# Altium PCB ALTAIR_PD_Squad_V26.5a.PcbDoc (part 3 of 3)
Units mm, origin at the board's own origin, x right, y up, seen from the top; angles counter-clockwise.
Board outline 65 x 52 mm, 4 copper layers (Top Layer, Layer 2, Layer 3, Bottom Layer), stack 1.818 mm thick; 171 components, 122 nets, 540 pads, 371 vias.
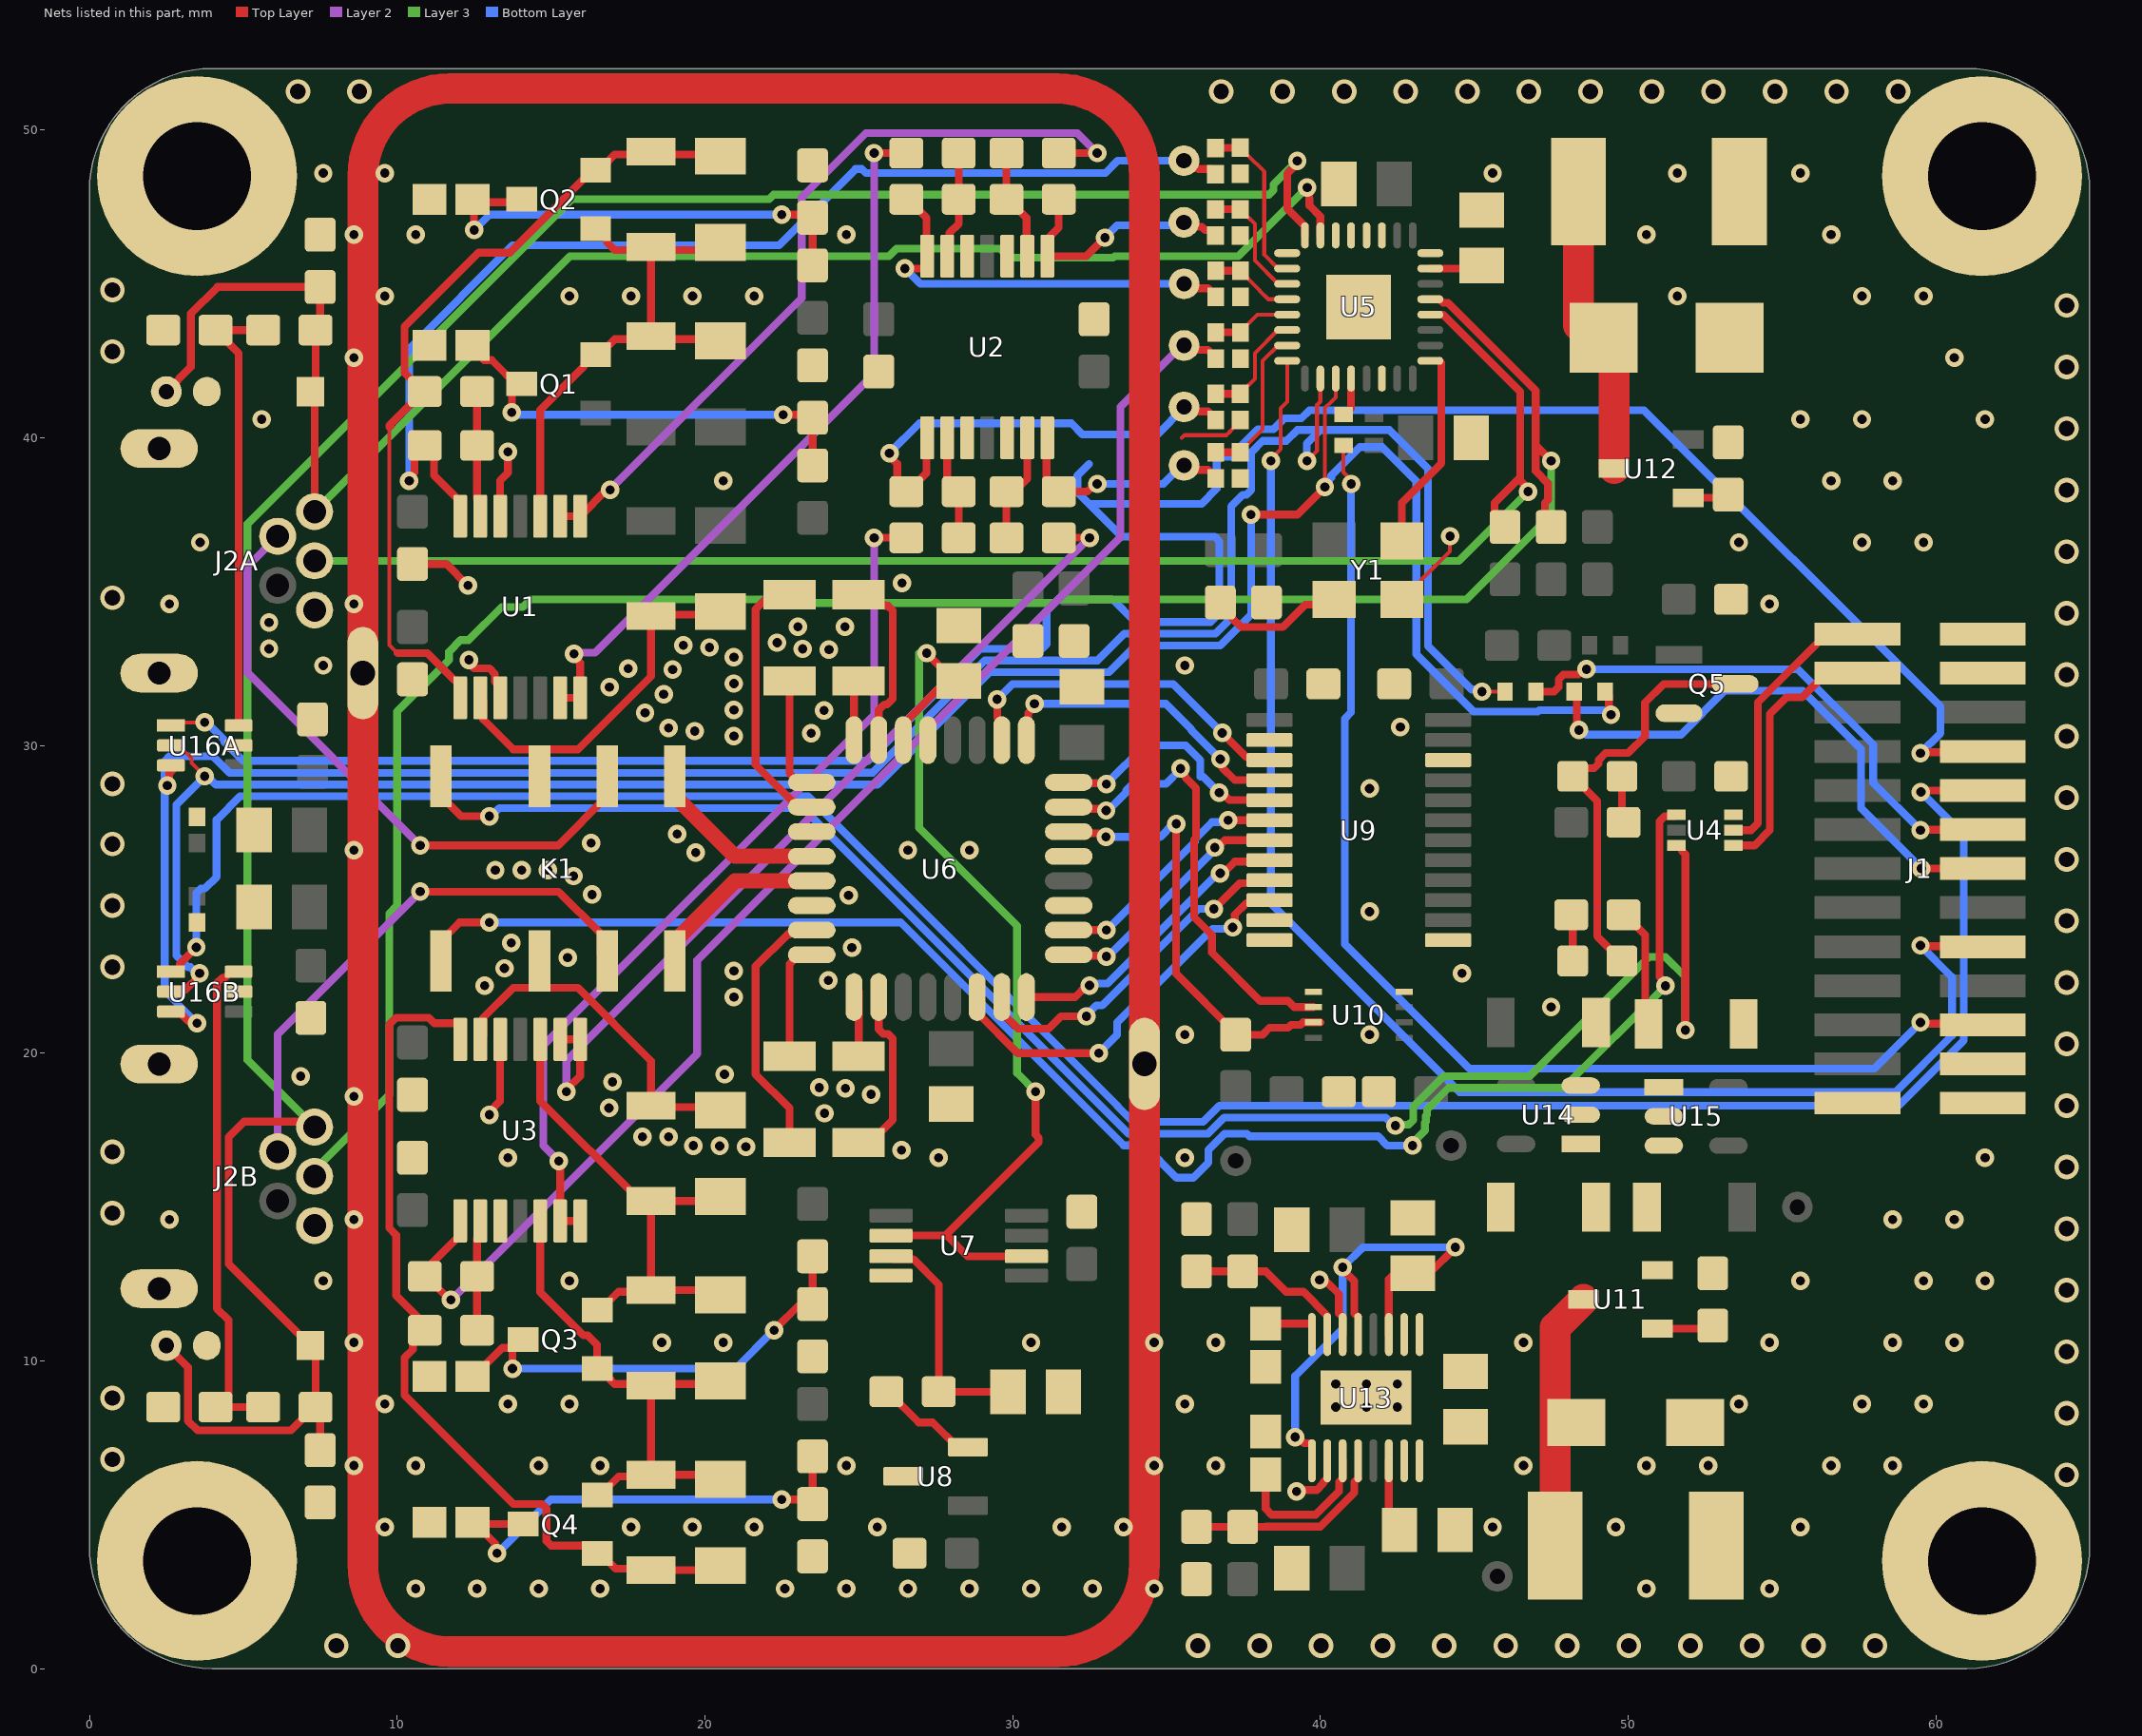
[diagram p4: the nets of this part, all layers, seen from the top]

## Via types
v1: diameter 0.6, hole 0.3, Top Layer to Bottom Layer, tented both sides, 305 vias
v2: diameter 0.8, hole 0.5, Top Layer to Bottom Layer, 59 vias
v3: diameter 0.6, hole 0.3, Top Layer to Bottom Layer, 7 vias

## Nets (pads, with @x,y where several pads share a name; then routed paths per layer and width w, separated by ;. In a path a pad name is that pad's centre, name@x,y a point inside that pad or via, vN(x,y) a via of type N, cw(c..) or ccw(c..) an arc to the next point about the centre after c; other vN are vias at no path point) (continued)
NetC1_2: C1.2 K1.7 R5.1 U1.2 | length 12.5
  Top Layer w0.254: U1.2@12.7,31.55 12.798,31.452 12.798,30.847 13.772,29.873 14.404,29.873 K1.7@14.627,29.65 ; K1.7@14.627,29 K1.7@14.627,29.65 ; C1.2@18.25,34.2 18.25,32.25 15.873,29.873 14.85,29.873 K1.7@14.627,29.65 ; C1.2@18.4,34.25 R5.1@20.5,34.25
NetC2_1: C2.1 C3.2 Q1.2 Q2.1 R6.2 R7.1 U1.10 | length 17.8
  Top Layer w0.254: U1.10@14.65,37.45 14.65,40.9 16.077,42.327 16.077,42.427 16.35,42.7 Q1.2@16.45,42.7 ; Q1.2@16.45,42.6 16.55,42.6 16.823,42.873 16.823,42.954 17.069,43.2 C2.1@18.25,43.2 ; Q2.1@16.45,46.7 16.55,46.7 16.823,46.427 16.823,46.346 17.069,46.1 C3.2@18.25,46.1 ; R6.2@20.5,43.05 20.35,43.2 C2.1@18.25,43.2 ; R7.1@20.5,46.25 20.35,46.1 C3.2@18.25,46.1 ; C2.1@18.25,43.2 C3.2@18.25,46.1
NetC3_1: C3.1 Q2.2 R7.2 R9.1 U1.1 | length 27
  Top Layer w0.127: 9.746,40.346 9.746,33.268 10.014,33
  Top Layer w0.254: 9.746,40.346 9.8,40.4 ; 9.746,40.396 R9.1@10.85,41.5 ; 10.014,33 10.986,33 11.863,32.123 11.952,32.123 12.05,32.025 U1.1@12.05,31.55 ; R9.1@10.9,41.5 R9.1@10.85,41.5 ; Q2.2@16.45,48.6 16.25,48.6 13.668,46.018 12.652,46.018 10.243,43.608 10.243,42.107 R9.1@10.85,41.5 ; Q2.2@16.55,48.6 16.823,48.873 16.823,48.954 17.069,49.2 20.35,49.2 R7.2@20.5,49.05
NetC6_2: C6.2 Q1.3 R10.1 R12.2 | length 14.6
  Top Layer w0.254: C6.2@12.451,42.9 12.827,42.524 13.076,42.524 13.95,41.65 Q1.3@14.05,41.65 ; v1(13.729,40.827) 13.729,41.477 14.002,41.75 Q1.3@14.05,41.75 ; v1(22.548,40.75) 23.4,40.75 R12.2@23.5,40.65 R10.1@23.5,39.1
  Bottom Layer w0.254: v1(13.729,40.827) 13.806,40.75 v1(22.548,40.75)
NetC7_2: C7.2 Q2.3 R11.1 R13.2 | length 15.4
  Top Layer w0.254: C7.2@12.451,47.65 Q2.3@14.05,47.65 ; C7.2@12.451,47.75 12.5,47.701 v1(12.5,46.75) ; v1(22.5,47.25) 23.4,47.25 R13.2@23.5,47.15 R11.1@23.5,45.6
  Bottom Layer w0.254: v1(12.5,46.75) 13,47.25 v1(22.5,47.25)
NetC11_1: C11.1 C12.2 Q3.1 Q4.2 R19.2 R20.1 U3.12 | length 16
  Top Layer w0.254: U3.12@14.65,14.55 14.65,12.241 16.053,10.838 16.193,10.838 16.5,10.531 Q3.1@16.5,9.75 ; Q4.2@16.5,5.65 16.6,5.65 17.2,6.25 C12.2@17.5,6.25 ; Q3.1@16.6,9.75 16.92,9.43 16.92,9.399 17.069,9.25 C11.1@18.25,9.25 ; R20.1@20.25,6.25 20.2,6.3 C12.2@18.25,6.3 C11.1@18.25,9.25 ; R19.2@20.5,9.35 20.4,9.25 C11.1@18.25,9.25
NetC11_2: C11.2 C13.1 Q3.2 R18.2 R19.1 U3.3 | length 15.8
  Top Layer w0.254: U3.3@14.65,20.45 14.65,18.45 17.85,15.25 18.25,15.25 C11.2@18.25,12.3 ; Q3.2@16.5,11.65 16.6,11.65 17.2,12.25 C11.2@17.5,12.25 ; C11.2@17.9,12.3 C11.2@18.25,12.3 ; C13.1@18.25,15.2 20.2,15.2 R18.2@20.25,15.25 ; R19.1@20.5,12.15 20.35,12.3 C11.2@18.25,12.3
NetC12_1: C12.1 Q4.1 R20.2 R22.1 U3.7 | length 27.6
  Top Layer w0.254: R22.1@10.75,11.25 10.75,11.35 9.968,12.132 9.968,14.096 9.746,14.318 9.746,20.932 9.968,21.154 11.032,21.154 11.212,20.974 11.952,20.974 12.05,20.876 U3.7@12.05,20.45 ; R22.1@10.9,11 10.887,11 10.514,10.627 10.514,10.379 10.243,10.108 10.243,8.892 13.781,5.354 14.705,5.354 14.854,5.205 14.854,4.149 15.003,4 16.25,4 Q4.1@16.5,3.75 ; Q4.1@16.6,3.75 17.1,3.25 C12.1@17.578,3.25 ; C12.1@18.25,3.2 20.2,3.2 R20.2@20.25,3.25
NetC13_2: C13.2 K1.2 R18.1 U3.6 | length 12.2
  Top Layer w0.254: U3.6@12.7,20.45 12.798,20.548 12.798,21.153 13.772,22.127 14.404,22.127 K1.2@14.627,22.35 ; K1.2@14.627,23 K1.2@14.627,22.35 ; C13.2@18.25,18.25 18.25,19.75 15.873,22.127 14.85,22.127 K1.2@14.627,22.35 ; C13.2@18.25,18.3 18.3,18.25 R18.1@20.5,18.25
NetC17_2: C17.2 Q3.3 R23.1 R25.2 | length 15.6
  Top Layer w0.254: C17.2@12.451,9.5 12.5,9.5 13.427,10.427 13.827,10.427 Q3.3@14.1,10.7 14.023,10.7 13.75,10.427 v1(13.75,9.75) ; v1(22.25,11) 23.1,11.85 R25.2@23.5,11.85 R23.1@23.5,13.5
  Bottom Layer w0.254: v1(13.75,9.75) 21,9.75 v1(22.25,11)
NetC18_2: C18.2 Q4.3 R24.1 R26.2 | length 15.4
  Top Layer w0.254: C18.2@12.451,4.75 12.5,4.75 13.184,4.066 13.184,3.816 v1(13.25,3.75) ; C18.2@12.75,4.75 12.8,4.7 Q4.3@14.1,4.7 ; v1(22.5,5.5) 23.35,5.5 R26.2@23.5,5.35 ; R26.2@23.5,5.3 R24.1@23.5,6.9
  Bottom Layer w0.254: v1(13.25,3.75) 15,5.5 v1(22.5,5.5)
NetC24_2: C24.2 U5.23 | length 2
  Top Layer w0.254: U5.23@43.575,45.5 45.25,45.5 C24.2@45.5,45.25
NetC35_1: C35.1 U6.22 U7.2 U7.6 | length 30.3
  Top Layer w0.254: U7.2@26.05,14.075 27.825,14.075 30.85,17.1 30.85,17.25 30.75,17.35 v1(30.75,18.75) ; U6.22@26.5,30.25 26.5,30.75 C35.1@27.85,32.1 ; v1(27.21,33) 27.21,32.99 28.1,32.1 C35.1@28.25,32.1 ; 27.864,14.075 28.539,13.4 U7.6@30.45,13.4
  Layer 3 w0.254: v1@26.96,33 26.96,27.325 30.147,24.138 30.147,19.353 v1(30.75,18.75)
NetC36_1: C36.1 R36.1 U7.3 | length 7.7
  Top Layer w0.254: U7.3@26.05,13.4 26.148,13.302 26.778,13.302 27.6,12.48 R36.1@27.6,9 C36.1@29.85,9
NetC39_2: C39.2 U13.6 | length 2.4
  Top Layer w0.254: U13.6@42.225,6.759 42.227,6.757 42.227,4.857 C39.2@42.575,4.509
NetC42_2: C42.2 U13.16 | length 1.8
  Top Layer w0.254: C42.2@38.225,11.21 39.723,11.21 39.725,11.208 U13.16@39.725,10.859
NetC43_1: C43.1 U13.7 U13.8
NetC43_2: C43.2 U13.9 U13.10
NetC45_2: C45.2 U13.3 | length 4.9
  Top Layer w0.254: C45.2@38.225,6.308 38.225,5.195 38.42,5 39.844,5 40.606,5.762 40.606,6.069 40.725,6.188 U13.3@40.725,6.759
NetCX1A_1: CX1A.1 U6.2 | length 5.7
  Top Layer w0.254: CX1A.1@25,17 25.275,17 26.104,17.829 26.104,20.48 25.955,20.629 25.796,20.629 25.647,20.778 U6.2@25.647,21.825
NetCX1A_2: CX1A.2 U6.1 | length 2.1
  Top Layer w0.254: CX1A.2@25,19.9 U6.1@25,22
NetCX1B_1: CX1B.1 U6.31 | length 8.5
  Top Layer w0.254: CX1B.1@22.75,17.1 22.75,18.216 21.646,19.32 21.646,22.817 22.691,23.862 22.754,23.862 22.892,24 U6.31@23.5,24
NetCX1B_2: CX1B.2 U6.32 | length 3.6
  Top Layer w0.254: CX1B.2@22.75,19.9 22.75,22.898 23.102,23.25 U6.32@23.25,23.25
NetCX2A_1: CX2A.1 U6.23 | length 5.5
  Top Layer w0.254: CX2A.1@25.348,34.952 25.348,34.927 25.723,34.552 25.854,34.552 25.872,34.534 25.955,34.534 26.104,34.386 26.104,31.52 25.918,31.334 25.834,31.334 25.647,31.147 U6.23@25.647,30.175
NetCX2A_2: CX2A.2 U6.24 | length 2.4
  Top Layer w0.254: U6.24@24.847,30.175 CX2A.2@24.847,32.347 ; CX2A.2@24.847,32.097 CX2A.2@25,32.25
NetCX2B_1: CX2B.1 U6.25 | length 4.1
  Top Layer w0.254: CX2B.1@22.75,32.35 22.75,29.097 23.047,28.8 U6.25@23.472,28.8
NetCX2B_2: CX2B.2 U6.26 | length 8.8
  Top Layer w0.254: CX2B.2@22.75,35.15 22.375,35.15 21.646,34.421 21.646,32.354 21.646,29.378 23.024,28 U6.26@23.472,28
NetD2_1: D2.1 D4.1 Q5.3 | length 13.9
  Top Layer w0.254: D2.1@49.8,23 49,23.8 49,28.2 D4.1@48.2,29 48.46,29.26 48.897,29.26 49.046,29.409 49.046,29.532 49.268,29.754 50.004,29.754 50.55,30.3 50.55,31.39 51.16,32 Q5.3@53.5,32
NetD2_2: D2.2 R38.1 | length 1.5
  Top Layer w0.254: R38.1@48.15,24.5 48.2,24.45 D2.2@48.2,23
NetD3_1: D3.1 F2.2 U12.3 | length 9.5
  Top Layer w1: F2.2@48.385,48 48.385,43.652 49.55,42.487 U12.3@49.55,39
NetD4_2: D4.2 R40.1 | length 1.5
  Top Layer w0.254: D4.2@49.8,29 49.8,27.55 R40.1@49.85,27.5
NetJ1_14: J1.14 R43.1 | length 18.5
  Top Layer w0.254: R43.1@48.3,31.7 48.334,31.666 48.334,30.566 v1(48.4,30.5) ; v1(59.526,26) J1.14@61.523,26
  Bottom Layer w0.254: v1(48.4,30.5) 48.494,30.5 48.643,30.351 51.712,30.351 53.14,31.778 55.676,31.778 57.568,29.886 57.568,27.958 v1(59.526,26)
NetK1_1: K1.1 U4.4 | length 53.7
  Top Layer w0.254: K1.1@11.427,23 11.427,23.65 12.027,24.25 v1(13,24.25) ; v1(51.216,22.19) 51.216,22.283 51.021,22.478 51.021,27.53 51.193,27.702 51.527,27.702 U4.4@51.575,27.75
  Layer 3 w0.254: v1(43,17) 43,17.094 43.4,17.493 43.4,17.743 43.432,17.775 43.432,17.961 43.467,17.996 43.467,18.176 44.166,18.875 47.901,18.875 v1(51.216,22.19)
  Bottom Layer w0.254: v1(13,24.25) 26.361,24.25 33.604,17.007 34.278,17.007 35.332,15.953 35.868,15.953 36.362,16.447 36.362,16.858 36.885,17.381 37.615,17.381 37.696,17.3 41.875,17.3 42.175,17 v1(43,17)
NetK1_4: K1.4 U6.29 | length 5.9
  Top Layer w0.5: K1.4@19,23 19,23.623 20.977,25.6 U6.29@23.472,25.6
NetK1_5: K1.5 U6.28 | length 5.9
  Top Layer w0.5: K1.5@19,29 19,28.377 20.977,26.4 U6.28@23.472,26.4
NetK1_8: K1.8 U4.6 | length 56.9
  Top Layer w0.254: K1.8@11.427,29 11.427,28.35 12.078,27.7 v1(13,27.7) ; U4.6@51.575,26.75 51.7,26.75 51.748,26.702 51.748,26.577 51.863,26.462 v1(51.863,20.75)
  Layer 3 w0.254: v1(42.443,17.647) 42.471,17.675 42.87,17.675 43.019,17.824 43.019,18.266 44.008,19.256 46.798,19.256 50.676,23.134 51.212,23.134 51.863,22.484 v1(51.863,20.75)
  Bottom Layer w0.254: v1(13,27.7) 13.056,27.7 13.322,27.966 23.184,27.966 33.762,17.388 36.353,17.388 36.878,17.913 42.121,17.913 42.387,17.647 v1(42.443,17.647)
NetR1_1: R1.1 R2.2 U2.13 | length 3.5
  Top Layer w0.254: U2.13@27.85,45.95 27.948,46.048 27.948,46.653 28.25,46.955 R1.1@28.25,47.75 R2.2@28.25,49.25
NetR1_2: R1.2 R32.1 TP3.1 U2.14 | length 13.6
  Top Layer w0.254: v1(26.5,45.5) 27.129,45.5 27.2,45.571 27.2,47.15 26.6,47.75 R1.2@26.55,47.75 ; TP3.1@35.571,45 35.714,44.857 36.343,44.857 R32.1@36.5,44.7
  Bottom Layer w0.254: v1(26.5,45.5) 27,45 TP3.1@35.68,45
NetR2_1: R2.1 U1.6 U1.7 | length 23.9
  Top Layer w0.254: U1.6@15.3,31.55 U1.7@15.95,31.55 15.95,32.682 15.75,32.882 v1(15.75,32.976) ; v1(25.5,49.25) R2.1@26.55,49.25
  Layer 2 w0.254: v1(15.75,32.976) 15.793,33.019 16.431,33.019 25.5,42.088 v1(25.5,49.25)
NetR3_1: R3.1 R4.2 U2.9 | length 3.6
  Top Layer w0.254: R4.2@29.8,49.25 R3.1@29.8,47.75 29.85,47.75 30.45,47.15 U2.9@30.45,45.95
NetR3_2: R3.2 R30.1 TP2.1 U2.8 | length 8.4
  Top Layer w0.254: U2.8@31.1,45.95 31.1,46.425 31.5,46.825 R3.2@31.5,47.75 ; U2.8@31.127,45.899 32.399,45.899 v1(33,46.5) ; TP2.1@35.567,47 35.709,46.857 36.143,46.857 36.252,46.748 36.448,46.748 36.5,46.696 R30.1@36.5,46.5
  Bottom Layer w0.254: v1(33,46.5) 33.4,46.9 TP2.1@35.853,46.9
NetR4_1: R4.1 U1.8 U1.9 | length 26
  Top Layer w0.254: U1.9@15.3,37.45 U1.8@15.95,37.45 16.809,38.309 v1(16.92,38.309) ; R4.1@31.5,49.25 v1(32.75,49.25)
  Layer 2 w0.254: v1(16.92,38.309) 23.147,44.536 23.147,47.812 25.232,49.897 32.103,49.897 v1(32.75,49.25)
NetR8_1: R8.1 R9.2 U1.13 | length 4
  Top Layer w0.254: R9.2@12.6,41.4 R8.1@12.6,39.75 12.6,38.025 12.7,37.925 U1.13@12.7,37.45
NetR8_2: R8.2 R28.1 TP1.1 U1.14 | length 37.8
  Top Layer w0.254: v1(10.393,38.602) 10.393,38.696 10.566,38.869 10.566,39.416 R8.2@10.9,39.75 11.198,39.452 11.198,38.777 12.05,37.925 U1.14@12.05,37.45 ; TP1.1@35.567,49.003 35.769,49.003 36.041,48.731 36.448,48.731 36.6,48.579 R28.1@36.6,48.5
  Bottom Layer w0.254: v1(10.393,38.602) 10.393,42.893 13.75,46.25 22.415,46.25 24.895,48.73 25.105,48.73 25.232,48.603 33.018,48.603 33.415,49 TP1.1@35.865,49
NetR14_1: R14.1 R15.2 U2.6 | length 3.5
  Top Layer w0.254: R15.2@29.8,36.75 29.8,37.985 30.477,38.662 U2.6@30.477,39.999
NetR14_2: R14.2 R35.1 TP6.1 U2.7 | length 7.7
  Top Layer w0.254: U2.7@31.1,40.05 31.1,38.623 31.473,38.25 R14.2@31.5,38.25 32.431,38.25 32.681,38.5 v1(32.75,38.5) ; TP6.1@35.571,39.1 35.714,38.957 36.343,38.957 R35.1@36.6,38.7
  Bottom Layer w0.254: v1(32.75,38.5) 34.9,38.5 TP6.1@35.6,39.2
NetR15_1: R15.1 U3.1 U3.2 | length 28.6
  Top Layer w0.254: U3.2@15.3,20.45 U3.1@15.95,20.45 15.95,19.263 15.5,18.813 v1(15.5,18.75) ; R15.1@31.5,36.75 v1(32.502,36.75)
  Layer 2 w0.254: v1(15.5,18.75) 15.5,19.748 v1(32.502,36.75)
NetR16_1: R16.1 R17.2 U2.2 | length 3.4
  Top Layer w0.254: U2.2@27.877,39.999 27.877,38.51 28.25,38.137 R17.2@28.25,36.75
NetR16_2: R16.2 R34.1 TP5.1 U2.1 | length 15.3
  Top Layer w0.254: v1(26,39.5) 26,39.406 26.252,39.154 26.252,38.548 R16.2@26.55,38.25 ; R16.2@26.6,38.25 27.2,38.85 U2.1@27.2,40.05 ; TP5.1@35.571,41 35.714,40.857 36.343,40.857 36.5,40.7 R34.1@36.5,40.6
  Bottom Layer w0.254: v1(26,39.5) 26.969,40.469 31.912,40.469 32.273,40.108 34.706,40.108 35.578,40.98 TP5.1@35.68,40.98
NetR17_1: R17.1 U3.13 U3.14 | length 28.7
  Top Layer w0.254: v1(15.25,16.5) 15.3,16.45 U3.13@15.3,14.55 U3.14@15.95,14.55 U3.14@16,14.5 ; v1(25.5,36.75) R17.1@26.55,36.75
  Layer 2 w0.254: v1(15.25,16.5) 14.75,17 14.75,20.25 25.5,31 v1(25.5,36.75)
NetR21_1: R21.1 R22.2 U3.9 | length 3.3
  Top Layer w0.254: R22.2@12.6,11.25 12.6,13 12.6,13.975 12.75,14.125 U3.9@12.75,14.5
NetR21_2: R21.2 R33.1 TP4.1 U3.8 | length 45.2
  Top Layer w0.254: R21.2@10.9,12.75 10.95,12.75 11.716,11.984 v1(11.75,11.984) ; R21.2@10.9,13 10.95,13 11.927,13.977 11.952,13.977 12,14.025 U3.8@12,14.5 ; TP4.1@35.571,43 35.714,42.857 36.343,42.857 R33.1@36.5,42.7
  Layer 2 w0.254: v1(11.75,11.984) 19.75,19.984 19.75,23.018 33.5,36.768 33.5,41 TP4.1@35.578,43.078
NetR27_1: R27.1 Y1.1 | length 4.8
  Top Layer w0.254: R27.1@36.446,34.75 36.6,34.75 37.123,34.227 37.123,34.149 37.426,33.846 38.782,33.846 39.514,34.578 40.274,34.578 Y1.1@40.446,34.75
NetR36_2: R36.2 U8.2 | length 3.4
  Top Layer w0.254: R36.2@25.9,9 25.95,9 26.95,8 27.4,8 28.2,7.2 U8.2@28.55,7.2
NetR37_1: R37.1 U6.14 U10.7 | length 14.3
  Top Layer w0.254: U6.14@31.822,27.2 31.879,27.143 32.82,27.143 32.935,27.028 v1(33.029,27.028) ; v1(35.315,27.453) 35.315,22.585 37.25,20.65 R37.1@37.25,20.6 38.12,20.6 38.347,20.827 38.952,20.827 39.05,20.925 39.359,20.925 39.438,21.004 39.996,21.004 U10.7@40,21
  Bottom Layer w0.254: v1(33.029,27.028) 34.796,27.028 35.222,27.453 v1(35.315,27.453)
NetR39_2: R39.2 U11.1 | length 1.8
  Top Layer w0.254: U11.1@50.95,11.05 52.65,11.05 R39.2@52.75,11.15
NetR41_2: R41.2 U12.1 | length 1.3
  Top Layer w0.254: U12.1@51.95,38.05 53.15,38.05 R41.2@53.25,38.15
NetR47_1: R47.1 R48.2 U13.15 | length 5.5
  Top Layer w0.254: R48.2@35.975,12.909 R47.1@37.475,12.909 38.227,12.909 38.886,12.25 39.445,12.25 40.223,11.472 40.223,10.861 U13.15@40.225,10.859
NetR49_1: R49.1 R50.2 U13.4 | length 6.1
  Top Layer w0.254: R50.2@35.975,4.609 R49.1@37.475,4.609 38.227,4.609 38.237,4.619 40.002,4.619 41.106,5.723 41.106,6.069 U13.4@41.223,6.186
NetU6_6: U6.6 U9.10 | length 13.1
  Top Layer w0.254: U6.6@28.847,21.825 28.847,21.325 30.172,20 v1(32.8,20) ; v1(37.151,24.089) 37.218,24.155 37.218,24.497 37.597,24.877 38.252,24.877 U9.10@38.35,24.975
  Bottom Layer w0.254: v1(32.8,20) 33.393,20.593 33.393,21.004 33.92,21.531 33.985,21.531 36.494,24.041 37.103,24.041 v1(37.151,24.089)
NetU6_7: U6.7 U9.9 | length 11.4
  Top Layer w0.254: U6.7@29.647,21.825 29.647,21.325 30.176,20.796 31.165,20.796 31.569,21.2 v1(32.4,21.2) ; v1(36.542,24.688) 37.382,25.527 38.252,25.527 U9.9@38.35,25.625
  Bottom Layer w0.254: v1(32.4,21.2) 32.4,21.231 32.722,21.553 32.911,21.553 36.045,24.688 v1(36.542,24.688)
NetU6_8: U6.8 U9.8 | length 9.7
  Top Layer w0.254: U6.8@30.447,21.825 32.031,21.825 32.406,22.2 v1(32.5,22.2) ; v1(36.746,25.847) 36.84,25.847 37.219,26.226 38.301,26.226 U9.8@38.35,26.275
  Bottom Layer w0.254: v1(32.5,22.2) 32.566,22.266 33.085,22.266 36.665,25.847 v1(36.746,25.847)
NetU6_9: U6.9 U9.7 | length 8.2
  Top Layer w0.254: U6.9@31.822,23.2 31.85,23.172 33.019,23.172 v1(33.047,23.144) ; v1(36.568,26.682) 36.662,26.682 36.905,26.925 U9.7@38.35,26.925
  Bottom Layer w0.254: v1(33.047,23.144) 33.108,23.144 36.568,26.604 v1(36.568,26.682)
NetU6_10: U6.10 U9.6 | length 8.1
  Top Layer w0.254: U6.10@31.822,24 v1(33.05,24) ; v1(37,27.572) 37.002,27.573 38.348,27.573 U9.6@38.35,27.575
  Bottom Layer w0.254: v1(33.05,24) 35.921,26.872 35.921,26.95 36.477,27.506 36.934,27.506 v1(37,27.572)
NetU6_15: U6.15 U10.6 | length 14.8
  Top Layer w0.254: U6.15@31.822,28 31.879,27.943 32.984,27.943 v1(33.041,27.887) ; v1(35.456,29.25) 35.456,29.156 35.617,28.995 35.617,28.956 35.962,28.611 35.962,26.991 35.895,26.924 35.895,24.42 36.477,23.838 36.477,23.269 38.048,21.698 38.952,21.698 39.05,21.6 ; 39.069,21.583 39.152,21.5 U10.6@39.778,21.5
  Bottom Layer w0.254: v1(33.041,27.887) 33.103,27.887 33.695,28.478 33.695,28.541 33.909,28.755 34.988,28.755 35.456,29.224 v1(35.456,29.25)
NetU6_16: U6.16 U9.5 | length 8.1
  Top Layer w0.254: U6.16@31.822,28.8 31.849,28.773 33.021,28.773 v1(33.048,28.746) ; v1(36.715,28.464) 36.808,28.464 37.048,28.225 U9.5@38.35,28.225
  Bottom Layer w0.254: v1(33.048,28.746) 34.301,30 35.626,30 36.103,29.523 36.103,28.982 36.197,28.982 v1(36.715,28.464)
NetU6_17: U6.17 U9.4 | length 10.2
  Top Layer w0.254: U6.17@30.447,30.175 30.504,30.232 30.504,31.053 30.711,31.259 v1(30.711,31.353) ; v1(36.749,29.556) 36.749,29.462 36.816,29.395 36.816,29.278 37.219,28.875 38.154,28.875 38.252,28.973 U9.4@38.35,28.875
  Bottom Layer w0.254: v1(30.711,31.353) 34.982,31.353 35.809,30.526 35.809,30.496 v1(36.749,29.556)
NetU6_18: U6.18 U9.3 | length 11.5
  Top Layer w0.254: v1(29.5,31.5) 29.5,30.902 29.647,30.755 U6.18@29.647,30.175 ; v1(36.813,30.408) 37.597,29.623 38.252,29.623 U9.3@38.35,29.525
  Bottom Layer w0.254: v1(29.5,31.5) 30,32 35.22,32 v1(36.813,30.408)
PD_AA: J2A.2 K1.6 | length 20.2
  Top Layer w0.254: v1(10.75,26.75) 15.227,26.75 16.827,28.35 K1.6@16.827,29
  Layer 2 w0.254: J2A.2@6.118,36.8 5.137,35.819 5.137,32.363 v1(10.75,26.75)
PD_AB: J2B.2 K1.3 | length 17.8
  Top Layer w0.254: v1(10.75,25.25) 15.25,25.25 16.604,23.896 16.604,23.223 K1.3@16.827,23
  Layer 2 w0.254: J2B.2@6.118,16.8 6.118,20.618 v1(10.75,25.25)
PD_KA: C53A.2 D5A.1 J2A.1 R51A.1 TP11A.1 U5.31 | length 53.5
  Top Layer w0.254: TP11A.1@2.5,41.5 3.296,42.296 3.296,44.032 4.164,44.9 C53A.2@7.5,44.9 7.5,43.65 R51A.1@7.35,43.5 7.35,41.67 D5A.1@7.18,41.5 7.318,41.362 J2A.1@7.318,37.6 ; v1(39.573,48.134) 39.639,48.067 39.639,47.776 39.647,47.768 39.647,47.544 39.998,47.193 39.998,46.577 U5.31@40,46.575
  Layer 3 w0.254: J2A.1@7.318,37.6 15.618,45.9 25.985,45.9 26.232,46.147 29.603,46.147 29.897,45.853 33.268,45.853 33.315,45.9 37.339,45.9 v1(39.573,48.134)
PD_KB: C53B.2 D5B.1 J2B.1 R51B.1 TP11B.1 U5.32 | length 84.2
  Top Layer w0.254: TP11B.1@2.5,10.5 3.204,9.796 3.204,8.06 3.518,7.746 6.546,7.746 7.3,8.5 R51B.1@7.35,8.5 ; J2B.1@7.318,17.6 7.137,17.781 5.031,17.781 4.527,17.277 4.527,13.153 6.832,10.848 6.857,10.848 7.18,10.525 D5B.1@7.18,10.5 7.35,10.33 R51B.1@7.35,8.5 ; C53B.2@7.5,7.1 7.5,8.35 R51B.1@7.35,8.5 ; v1(39.25,49) 39.25,48.906 38.926,48.582 38.926,47.445 39.5,46.871 U5.32@39.5,46.575
  Layer 3 w0.254: J2B.1@7.318,17.6 5.137,19.781 5.137,37.206 15.681,47.75 22.085,47.75 22.232,47.897 38.329,47.897 38.478,48.046 38.478,48.228 v1(39.25,49)
PDA_TMP_ADCIN: J2A.3 R54A.2 U5.20 | length 49.8
  Top Layer w0.254: U5.20@43.575,44 43.989,44 46.491,41.498 46.491,38.715 ; R54A.2@46,37.1 45.659,37.441 45.659,37.882 46.491,38.715 ; v1(46.75,38.25) 46.75,38.344 46.491,38.603 46.491,38.715
  Layer 3 w0.254: J2A.3@7.318,36 44.5,36 v1(46.75,38.25)
PDB_TMP_ADCIN: J2B.3 R54B.2 U5.21 | length 68.1
  Top Layer w0.254: U5.21@43.873,44.498 43.99,44.381 43.994,44.381 44.146,44.381 47,41.527 47,39.75 ; R54B.2@47.5,37.1 47.297,37.303 47.297,37.882 47.397,37.982 47.397,38.518 47,38.915 47,39.75 ; v1(47.5,39.25) 47,39.75
  Layer 3 w0.254: J2B.3@7.318,16 7.318,16.213 9.75,18.644 9.75,24.542 10,24.792 10,31.1 11.687,32.787 11.687,33.049 12.066,33.428 12.328,33.428 13.4,34.5 14.082,34.5 14.332,34.75 22.79,34.75 22.907,34.633 31.365,34.633 31.482,34.75 44.75,34.75 47.5,37.5 v1(47.5,39.25)
RELAY_A: J1.03 U4.1 | length 8.6
  Top Layer w0.254: U4.1@53.425,26.75 54.103,26.75 54.603,27.25 54.603,31.018 55.148,31.562 55.652,31.562 56.44,32.35 J1.03@57.465,32.35
RELAY_B: J1.01 U4.2 | length 9
  Top Layer w0.254: U4.2@53.425,27.25 54,27.25 54.222,27.472 54.222,31.402 56.44,33.62 J1.01@57.465,33.62
rSPI_MOSI: R44.2 U5.10 U16A.3 U16B.3 | length 72.9
  Top Layer w0.127: v1(39.563,39.25) 39.892,39.579 39.892,41.071 40,41.179 U5.10@40,41.925 ; v1(45.25,31.75) R44.2@46,31.75
  Top Layer w0.254: v1(2.533,28.698) 2.599,28.764 2.599,29.099 U16A.3@2.75,29.25 ; U16B.3@2.65,21.35 2.9,21.35 3.209,21.041 3.433,21.041 v1(3.499,20.975)
  Bottom Layer w0.254: v1@2.448,28.698 2.448,22.026 v1(3.499,20.975) ; v1(2.533,28.698) 2.533,28.791 2.448,28.876 2.448,29.498 2.597,29.647 4.018,29.647 4.556,29.109 24.909,29.109 24.919,29.119 25.458,29.119 29.101,32.762 32.762,32.762 33.631,33.631 36.592,33.631 37.102,34.14 37.102,37.768 37.481,38.147 37.6,38.147 37.749,38.296 37.749,39.518 38.128,39.897 38.897,39.897 39.25,40.25 40,40.25 ; v1(39.563,39.25) 39.563,39.813 40,40.25 ; v1(45.25,31.75) 45.184,31.816 44.917,31.816 43.5,33.233 43.5,39 42.25,40.25 40,40.25
rSPI_SCLK: R43.2 U5.11 U16A.2 U16B.2 | length 73.5
  Top Layer w0.127: U16A.2@3,30 3,29.9 3.316,29.584 3.316,29.434 v1(3.75,29) ; v1(40.146,38.396) 40.146,40.966 40.375,41.194 40.385,41.194 40.5,41.309 U5.11@40.5,41.925
  Top Layer w0.254: U16B.2@2.65,22 2.723,22.073 3.137,22.073 3.583,22.519 v1(3.583,22.595) ; v1(37.749,37.5) 39.25,37.5 v1(40.146,38.396) ; R43.2@49.25,31.75 49.373,31.627 49.373,31.162 49.444,31.091 v1(49.444,30.998)
  Bottom Layer w0.254: v1(3.583,22.595) 3.489,22.595 3.289,22.795 3.208,22.795 2.829,23.174 2.829,28.079 v1(3.75,29) 3.844,29 4.116,28.728 25.605,28.728 29.259,32.381 33.131,32.381 34,33.25 36.75,33.25 37.749,34.249 v1(37.749,37.5) ; v1(40.146,38.396) 40.146,38.49 40.353,38.697 40.353,38.768 41.28,39.695 42.018,39.695 43.119,38.594 43.119,32.966 44.982,31.103 47.07,31.103 47.114,31.147 49.201,31.147 49.35,30.998 v1(49.444,30.998)
SPI_CS_DAC_CHA: J1.08 U16A.1 | length 84
  Top Layer w0.127: U16A.1@2.65,30.65 2.75,30.75 v1(3.75,30.75)
  Top Layer w0.254: v1(59.5,29.75) 59.53,29.78 61.505,29.78 J1.08@61.535,29.81
  Bottom Layer w0.254: v1(3.75,30.75) 3.811,30.75 4.397,30.164 4.397,30.103 5,29.5 25.3,29.5 28.943,33.143 30.954,33.143 31.103,33.292 31.103,34.371 31.482,34.75 33.25,34.75 33.988,34.012 36.434,34.012 36.721,34.298 36.721,36.635 36.572,36.783 33.552,36.783 32.482,37.853 ; 32.482,39.147 32.103,38.768 32.103,38.232 32.482,37.853 ; v1(59.5,29.75) 60.147,30.397 60.147,31.268 50.518,40.897 39.647,40.897 39.381,40.631 38.831,40.631 38.478,40.278 37.97,40.278 37.368,39.676 37.368,39.53 37.219,39.381 36.78,39.381 36.631,39.232 36.631,38.342 36.142,37.853 32.482,37.853
SPI_CS_DAC_CHB: J1.10 U16B.1 | length 79
  Top Layer w0.254: U16B.1@2.65,22.65 2.863,22.65 2.936,22.723 2.936,22.902 v1(3.476,23.442) ; v1(59.515,28.488) 59.567,28.54 J1.10@61.535,28.54
  Bottom Layer w0.254: v1(3.476,23.442) 3.476,25.204 3.625,25.353 3.756,25.353 4.135,25.732 4.135,27.585 4.897,28.347 23.353,28.347 33.404,18.296 33.404,18.285 33.92,17.769 36.195,17.769 36.72,18.294 58.787,18.294 60.909,20.416 60.909,27.093 v1(59.515,28.488)
SPI_MISO: J1.22 R29.2 | length 39.5
  Top Layer w0.127: R29.2@40.75,39.75 40.75,38.878 41,38.628 v1(41,38.5)
  Top Layer w0.254: v1(59.5,21) 59.54,20.96 61.495,20.96 J1.22@61.535,20.92
  Bottom Layer w0.254: v1(41,38.5) 41,31.078 40.793,30.871 40.793,23.542 44.836,19.499 57.999,19.499 v1(59.5,21)
SPI_MISO_ADCA: R29.1 U5.12 | length 1.3
  Top Layer w0.254: R29.1@40.75,40.75 40.8,40.75 41,40.95 U5.12@41,41.925
SPI_MOSI: J1.12 R44.1 | length 17.9
  Top Layer w0.254: R44.1@47,31.75 47.597,31.75 47.746,31.899 47.746,32.155 47.895,32.304 48.378,32.304 48.552,32.478 v1(48.646,32.478) ; v1(59.5,27.25) 59.51,27.26 61.525,27.26 J1.12@61.535,27.27
  Bottom Layer w0.254: v1(48.646,32.478) 55.514,32.478 57.964,30.028 57.964,28.786 v1(59.5,27.25)
STRT: J1.18 U5.8 | length 48.6
  Top Layer w0.127: v1@38.4,39.3 38.4,39.328 38.706,39.634 38.706,40.956 38.925,41.175 U5.8@38.925,42.5
  Top Layer w0.254: v1(59.5,23.5) 59.52,23.48 61.515,23.48 J1.18@61.535,23.46
  Bottom Layer w0.254: v1(38.396,39.25) 38.396,24.862 44.52,18.737 58.691,18.737 60.528,20.574 60.528,22.472 v1(59.5,23.5)
SYS_CLK: U5.17 Y1.3 | length 6.4
  Top Layer w0.254: Y1.3@42.646,36.65 42.646,37.887 43.929,39.17 43.929,42.442 U5.17@43.871,42.5
SYS_DVDD: F2.1 J1.02
SYS_GND: C4.1 C5.1 C6.1 C7.1 C8.1 C9.1 C10.1 C14.1 C15.1 C16.1 C17.1 C18.1 C19.1 C20.1 C21.1 C22.1 C23.1 C24.1 C25.1 C26.1 C27.1 C28.1 C29.1 C30.2 C31.1 C32.2 C33.2 C34.2 C35.2 C36.2 C37.2 C38.2 C39.1 C40.1 C41.1 C42.1 C44.1 C45.1 C46.2 C47.2 C48.2 C49.2 C50A.1 C50B.1 C51A.1 C51B.1 C52A.1 C52B.1 C53A.1 C53B.1 D1.2 D3.2 D5A.2 D5B.2 H1.1 H2.1 H3.1 H4.1 J1.04 J1.24 J2A.5 J2A.6 J2B.5 J2B.6 Q5.2 R12.1 R13.1 R25.1 R26.1 R39.1 R41.1 R42.1 R48.1 R50.1 R52A.2 R52B.2 RT1.1 SH1.1 U1.3 U1.12 U2.3 U2.5 U2.10 U2.12 U3.5 U3.10 U4.3 U5.1 U5.14 U5.24 U5.27 U5.28 U5.29 U5.30 U5.33 U6.11 U6.13 U6.21 U6.27 U6.30 U7.4 U8.3 U9.2 U9.11 U9.12 U9.13 U9.22 U10.4 U10.5 U13.2 U13.14 U13.17 U14.2 U15.2 U16A.5 U16B.5 Y1.2 | length 17.7
  Top Layer w0.127: 35.5,40 35.585,40.084 36.954,40.084 37.066,40.196 37.066,40.216 37.4,40.55 C27.1@37.4,40.575 ; Y1.2@42.646,34.75 42.746,34.75 43.283,35.286 43.283,35.386 44.206,36.31 44.206,36.788 v1(44.218,36.8)
  Top Layer w0.254: C5.1@10.5,35.9 11.6,35.9 v1(12.3,35.2) ; v1(12.334,32.781) 12.334,32.67 12.5,32.504 13.001,32.504 13.179,32.326 13.179,32.071 13.35,31.9 U1.3@13.35,31.55 ; v1(13,18) 13,18.094 13.35,18.444 U3.5@13.35,20.45 ; U1.12@13.35,37.45 13.35,38.611 13.602,38.863 v1(13.602,39.545) ; v1(39.225,5.759) 39.271,5.805 39.882,5.805 40.104,6.027 40.104,6.067 40.225,6.188 U13.2@40.225,6.759 ; v1(39.977,12.633) 40.043,12.567 40.208,12.567 40.604,12.171 40.604,11.551 40.725,11.43 U13.14@40.725,10.859
  other v1: 10.6,2.6 12.6,2.6 14.6,2.6 16.6,2.6 22.6,2.6 24.6,2.6 26.6,2.6 28.6,2.6 30.6,2.6 32.6,2.6 34.6,2.6 50.6,2.6 54.6,2.6 9.6,4.6 17.6,4.6 19.6,4.6 21.6,4.6 25.6,4.6 31.6,4.6 33.6,4.6 45.6,4.6 49.6,4.6 55.6,4.6 8.6,6.6 10.6,6.6 14.6,6.6 16.6,6.6 24.6,6.6 34.6,6.6 36.6,6.6 46.6,6.6 50.6,6.6 52.6,6.6 56.6,6.6 58.6,6.6 9.6,8.6 13.6,8.6 15.6,8.6 35.6,8.6 53.6,8.6 57.6,8.6 59.6,8.6 8.6,10.6 18.6,10.6 20.6,10.6 30.6,10.6 34.6,10.6 36.6,10.6 46.6,10.6 54.6,10.6 58.6,10.6 60.6,10.6 7.6,12.6 15.6,12.6 55.6,12.6 59.6,12.6 61.6,12.6 2.6,14.6 8.6,14.6 58.6,14.6 60.6,14.6 13.6,16.6 27.6,16.6 35.6,16.6 61.6,16.6 26.386,16.853 21.335,16.957 20.482,16.985 19.628,16.995 17.971,17.285 18.825,17.285 23.89,18.047 16.885,18.221 8.6,18.6 25.402,18.664 24.571,18.86 23.717,18.883 16.996,19.068 6.864,19.251 20.639,19.315 35.6,20.6 41.6,20.6 20.944,21.821 12.846,22.194 24.009,22.362 44.6,22.6 20.944,22.675 13.487,22.758 15.542,23.11 24.78,23.431 13.713,23.582 41.6,24.6 24.671,25.134 16.338,25.156 15.731,25.757 13.192,25.952 14.046,25.952 14.9,25.952 19.701,26.517 8.6,26.6 26.6,26.6 28.6,26.6 16.304,26.834 19.097,27.121 41.6,28.6 20.944,30.304 23.452,30.4 19.674,30.468 18.826,30.565 42.6,30.6 18.058,31.064 20.944,31.158 23.875,31.142 18.661,31.668 16.901,31.894 20.944,32.012 18.952,32.471 17.505,32.498 7.6,32.6 35.6,32.6 20.944,32.866 23.179,33.14 24.032,33.116 5.84,33.142 20.152,33.185 19.3,33.251 22.348,33.339 23.025,33.86 24.549,33.86 5.84,33.996 2.6,34.6 8.6,34.6 54.6,34.6 26.406,35.28 3.6,36.6 53.6,36.6 57.6,36.6 59.6,36.6 20.6,38.6 56.6,38.6 58.6,38.6 5.6,40.6 55.6,40.6 57.6,40.6 61.6,40.6 8.6,42.6 60.6,42.6 9.6,44.6 15.6,44.6 17.6,44.6 19.6,44.6 21.6,44.6 51.6,44.6 57.6,44.6 59.6,44.6 8.6,46.6 10.6,46.6 24.6,46.6 50.6,46.6 56.6,46.6 7.6,48.6 9.6,48.6 45.6,48.6 51.6,48.6 55.6,48.6
  other v2: 8.025,0.75 10.025,0.75 36.025,0.75 38.025,0.75 40.025,0.75 42.025,0.75 44.025,0.75 46.025,0.75 48.025,0.75 50.025,0.75 52.025,0.75 54.025,0.75 56.025,0.75 58.025,0.75 64.25,6.3 0.75,6.8 64.25,8.3 0.75,8.8 64.25,10.3 64.25,12.3 64.25,14.3 0.75,14.8 64.25,16.3 0.75,16.8 64.25,18.3 64.25,20.3 64.25,22.3 0.75,22.8 64.25,24.3 0.75,24.8 64.25,26.3 0.75,26.8 64.25,28.3 0.75,28.75 64.25,30.3 64.25,32.3 64.25,34.3 0.75,34.8 64.25,36.3 64.25,38.3 64.25,40.3 64.25,42.3 0.75,42.8 64.25,44.3 0.75,44.8 6.775,51.25 8.775,51.25 36.775,51.25 38.775,51.25 40.775,51.25 42.775,51.25 44.775,51.25 46.775,51.25 48.775,51.25 50.775,51.25 52.775,51.25 54.775,51.25 56.775,51.25 58.775,51.25
  other v3: 40.5,8.5 41.5,8.5 42.5,8.5 40.5,9.25 41.5,9.25 42.5,9.25 47.5,21.5
SYS_VBAT: F1.1 J1.25 J1.26
SYS_VBAT_F: D1.1 F1.2 U11.3 | length 7.9
  Top Layer w1: F1.2@47.635,4.5 47.635,11.085 U11.3@48.55,12
SYS_VBAT_RB: C40.2 C47.1 C49.1 R38.2 U11.2 U13.1 U13.11 U13.13 U14.1 U14.3 U15.1 U15.3 | length 21.1
  Top Layer w0.254: v1(39.18,7.526) 39.274,7.526 39.468,7.332 39.723,7.332 39.725,7.33 U13.1@39.725,6.759 ; v1(40.725,13.044) 40.725,12.972 41.106,12.592 41.106,11.549 U13.13@41.223,11.432 ; U13.11@42.225,10.859 42.225,12.659 C40.2@42.575,13.009 ; C40.2@43,12.85 43.542,12.85 v1(44.387,13.695) ; R38.2@49.85,24.5 49.9,24.5 50.554,23.846 50.554,21.056 C49.1@50.66,20.95
  Bottom Layer w0.254: v1(39.18,7.526) 39.18,9.513 40.725,11.058 v1(40.725,13.044) 41.376,13.695 v1(44.387,13.695)
TIA_CHA_HIGH_ADCIN: C22.2 R28.2 U5.2 | length 5.6
  Top Layer w0.127: C22.2@37.3,49.4 37.511,49.189 37.631,49.189 38.178,48.642 38.178,45.947 38.625,45.5 U5.2@38.925,45.5
  Top Layer w0.254: R28.2@36.6,49.4 36.617,49.417 37.392,49.417 C22.2@37.4,49.425
TIA_CHA_LOW_ADCIN: C25.2 R32.2 U5.4 | length 2.7
  Top Layer w0.127: C25.2@37.4,45.4 37.611,45.188 37.635,45.188 38.034,44.79 38.034,44.776 38.309,44.5 U5.4@38.925,44.5
  Top Layer w0.254: R32.2@36.6,45.425 C25.2@37.425,45.425
TIA_CHA_MID_ADCIN: C23.2 R30.2 U5.3 | length 4.1
  Top Layer w0.127: C23.2@37.4,47.5 37.4,47.4 37.611,47.189 37.631,47.189 37.87,46.95 37.87,45.755 38.625,45 U5.3@38.925,45
  Top Layer w0.254: R30.2@36.596,47.425 37.375,47.425 C23.2@37.4,47.4
TIA_CHB_HIGH_ADCIN: C26.2 R33.2 U5.5 | length 2.6
  Top Layer w0.127: C26.2@37.5,43.3 37.5,43.546 37.954,44 U5.5@38.925,44
  Top Layer w0.254: R33.2@36.7,43.4 36.725,43.425 C26.2@37.404,43.425
TIA_CHB_LOW_ADCIN: C28.2 R35.2 U5.7 | length 5
  Top Layer w0.127: C28.2@37.4,39.5 37.4,39.55 38.124,40.274 38.124,42.498 38.625,43 U5.7@38.925,43
  Top Layer w0.254: R35.2@36.6,39.525 37.275,39.525 C28.2@37.3,39.5
TIA_CHB_MID_ADCIN: C27.2 R34.2 U5.6 | length 3.7
  Top Layer w0.127: C27.2@37.5,41.425 37.5,41.55 37.87,41.919 37.87,42.744 38.625,43.5 U5.6@38.925,43.5
  Top Layer w0.254: R34.2@36.6,41.425 37.375,41.425 C27.2@37.4,41.4
VBIASA: C52A.2 R51A.2 U16A.6 | length 14.7
  Top Layer w0.254: C52A.2@4.1,43.5 R51A.2@5.65,43.5 ; C52A.2@4.15,43.5 4.523,43.127 4.523,43.077 4.85,42.75 U16A.6@4.85,30.65
VBIASB: C52B.2 R51B.2 U16B.6 | length 16.5
  Top Layer w0.254: C52B.2@4.1,8.5 R51B.2@5.65,8.5 ; C52B.2@4.15,8.5 4.523,8.873 4.523,8.923 4.524,8.924 4.524,11.326 4.146,11.704 4.146,22.276 4.324,22.454 4.404,22.454 4.6,22.65 U16B.6@4.85,22.65
pads on no net: U5.25 U6.4 U6.5 U6.19 U6.20 U7.1 U7.5 U7.8

## Polygon pours and split planes (outlines as drawn)
no net on Bottom Solder "Edge_Plating_B" (solid): 0,32 0.024,0 65,0 65,52 -0.045,52 0,32 1.514,32 1.514,4.486 4.5,1.5 60,1.5 63.5,5 63.5,47.5 60.5,50.5 4.498,50.5 1.491,47.489 1.514,32
no net on Top Solder "Edge_Plating_B" (solid, pour order 334): 0,32 0.024,0 65,0 65,52 -0.045,52 0,32 1.514,32 1.514,4.486 4.5,1.5 60,1.5 63.5,5 63.5,47.5 60.5,50.5 4.498,50.5 1.491,47.489 1.514,32
no net on Top Solder "NONET_L-01_P-001" (solid): 10,26 10,24.5 11.25,24.5 11.5,24.75 13.5,24.75 13.5,23.5 12.38,22.38 12.38,21 13.5,21 14,21.5 16,21.5 16.5,21 16.5,17.5 17.75,16.25 26.75,16.25 26.75,20.25 26,21 26,22.75 24.5,24.25 24.5,26
no net on Top Solder "NONET_L-01_P-001" (solid): 10,26 10,27.5 11.25,27.5 11.5,27.25 13.75,27.25 13.75,28.5 12.5,29.75 12.5,31 13.5,31 14,30.5 16,30.5 16.5,31 16.5,34.5 17.75,35.75 26.75,35.75 26.75,31.75 26,31 26,29.25 24.5,27.75 24.5,26
SYS_GND on Top Layer "SYS_GND_L01_P338" (solid, remove dead copper, pour order 341): 0,4 0,48 cw(c4,48) 4,52 61,52 cw(c61,48) 65,48 65,4 cw(c61,4) 61,0 4,0 cw(c4,4)
SYS_GND on Top Layer "Top Layer-SYS_GND" (solid, pour order 342): 732 vertices, not listed, extent 9.753,15.759 27.108,36.241
SYS_VBAT on Top Layer "NONET_L-01_P-001" (solid, pour order 333): 55.6,19 62.9,19 62.9,7.4 60,7.4 54.5,1.9 50.9,1.9 50.9,5.9 51.2,6.2 52.291,6.2 55.525,9.409
SYS_DVDD on Top Layer "NONET_L-01_P-001" (solid, pour order 336): 52.1,50.1 54.9,50.1 63.2,41.8 63.2,33 59.5,33 59.5,40.5 54.2,45.8 54.1,45.7 52.1,45.7
NetC43_1 on Top Layer "Cap2" (solid, pour order 337): 42.594,7.204 42.594,5.684 44.2,5.684 45.75,7.234 45.75,8.434 44.131,8.434
NetC43_2 on Top Layer "Cap1" (solid, pour order 338): 42.595,10.213 42.595,11.709 44.175,11.709 45.725,10.159 45.725,8.959 44.162,8.959
SYS_VBAT_RB on Top Layer "NONET_L-01_P-001" (solid, pour order 340): 50.25,12.25 51.75,12.25 51.75,13.25 51.25,13.75 50,13.75 50,16.5 52,16.5 52,17.5 50.25,17.5 50.25,18.5 52,18.5 52,22.25 50.75,23.5 50.75,25 50.25,25.5 49,25.5 49,22.25 49.25,22.25 49.75,21.75 49.75,19.5 47.75,19.5 47.5,19.25 47.5,18.5 49.25,18.5 49.25,17.5 47.5,17.5 47.25,17.25 47.25,14 42.4,14 42.275,13.875 42.275,11.9 46.425,11.9 47.275,12.75 48.75,12.75
SYS_GND on Top Layer "Top Layer-SYS_GND 1" (solid, pour order 344): 19.362,32.95 19.274,32.913 19.254,32.91 19.254,32.25 19.247,32.194 19.247,32.137 19.232,32.082 19.224,32.026 19.203,31.973 19.188,31.918 19.148,31.821 19.119,31.772 19.098,31.72 19.063,31.675 19.035,31.625 18.994,31.585 18.96,31.54 17.895,30.476 17.927,30.434 18.065,30.613 18.244,30.75 18.453,30.837 18.677,30.866 19.377,30.866 19.602,30.837 19.811,30.75 19.99,30.613 20.128,30.433 20.214,30.224 20.244,30 20.244,28.719 21.442,27.521 21.932,27.521 21.918,27.563 21.893,27.614 21.882,27.67 21.881,27.671 20.936,28.616 20.902,28.661 20.861,28.702 20.833,28.751 20.798,28.796 20.777,28.848 20.748,28.897 20.744,28.907 20.708,28.995 20.693,29.05 20.672,29.102 20.664,29.158 20.649,29.213 20.649,29.27 20.642,29.326 20.642,32.884 19.675,32.884 19.451,32.913
SYS_GND on Top Layer "Top Layer-SYS_GND 2" (solid, pour order 353): 21.932,24.479 21.442,24.479 20.244,23.281 20.244,22 20.214,21.776 20.128,21.567 19.99,21.387 19.811,21.25 19.602,21.163 19.377,21.134 18.677,21.134 18.453,21.163 18.244,21.25 18.065,21.387 17.927,21.566 17.895,21.524 18.96,20.46 18.994,20.415 18.995,20.415 19.035,20.375 19.063,20.325 19.098,20.28 19.119,20.228 19.148,20.179 19.188,20.082 19.203,20.027 19.224,19.974 19.232,19.918 19.247,19.863 19.247,19.806 19.254,19.75 19.254,19.59 19.274,19.587 19.362,19.55 19.451,19.587 19.675,19.616 20.642,19.616 20.642,22.674 20.649,22.73 20.649,22.787 20.664,22.842 20.672,22.898 20.693,22.95 20.708,23.005 20.744,23.093 20.748,23.103 20.777,23.152 20.798,23.204 20.833,23.249 20.861,23.298 20.902,23.339 20.936,23.384 21.881,24.329 21.882,24.33 21.893,24.386 21.918,24.437
SYS_GND on Top Layer "Top Layer-SYS_GND 3" (solid, pour order 345): 17.927,27.566 17.79,27.387 17.611,27.25 17.402,27.163 17.177,27.134 17.031,27.134 15.937,26.04 15.899,26.01 15.915,25.994 15.96,25.96 17.053,24.866 17.177,24.866 17.402,24.837 17.611,24.75 17.79,24.613 17.927,24.434 18.065,24.613 18.244,24.75 18.453,24.837 18.655,24.864 19.792,26 18.655,27.136 18.453,27.163 18.244,27.25 18.065,27.387
SYS_GND on Top Layer "Top Layer-SYS_GND 4" (solid, pour order 343): 23.875,33.609 23.824,33.588 23.6,33.559 22.65,33.559 22.65,33.441 23.6,33.441 23.824,33.412 23.875,33.391 23.926,33.412 24.15,33.441 25.1,33.441 25.1,33.559 24.15,33.559 23.926,33.588
SYS_GND on Top Layer "Top Layer-SYS_GND 5" (solid, pour order 354): 23.875,18.609 23.824,18.588 23.679,18.569 23.688,18.547 23.703,18.493 23.724,18.44 23.726,18.425 23.824,18.412 24.033,18.325 24.213,18.188 24.35,18.008 24.43,17.816 24.471,17.84 24.571,17.898 24.668,17.938 24.723,17.953 24.776,17.974 24.832,17.982 24.839,17.984 25.1,18.245 25.1,18.559 24.15,18.559 23.926,18.588
SYS_GND on Layer 2 "SYS_GND_L02_P346" (solid, pour order 346): 0,4 0,48 cw(c4,48) 4,52 61,52 cw(c61,48) 65,48 65,4 cw(c61,4) 61,0 4,0 cw(c4,4)
SYS_GND on Layer 2 "Layer 2-SYS_GND" (solid, pour order 339): 315 vertices, not listed, extent 4.133,15.324 11.747,38.276
SYS_GND on Bottom Layer "SYS_GND_L04_P351" (solid, remove dead copper, pour order 351): 0,4 0,48 cw(c4,48) 4,52 61,52 cw(c61,48) 65,48 65,4 cw(c61,4) 61,0 4,0 cw(c4,4)
AVDD on Bottom Layer "NONET_L-01_P-001" (solid, pour order 349): 5.6,32.005 5.6,30 12.2,30 12.8,30.6 12.8,36.1 15.7,39 23.9,39 23.9,44.2 24.3,44.6 25.2,44.6 28.9,40.9 31.9,40.9 32.5,40.3 33.6,40.3 33.6,41.6 30.7,44.5 26.9,44.5 25.4,46 19.39,46
AVSS on Bottom Layer "NONET_L-01_P-001" (solid, pour order 335): 13.1,35.8 13.1,33.6 13.4,33.3 17.9,33.3 17.9,33.4 19,34.5 24,34.5 26.6,37.1 25.5,38.2 25.5,44.5 25.3,44.7 23.6,44.7 23.6,39.8 20.6,36.8 14.1,36.8
AVSS on Bottom Layer "NONET_L-01_P-001" (solid, pour order 348): 43.4,6 43.4,2.5 42.9,2 34,2 28.7,7.3 22.4,7.3 22.4,10 23.6,11.2 23.2,11.6 23.2,14 10.6,14 10.4,14.2 10.5,14.3 10.5,17.6 24.2,17.6 35.8,6 39.1,6
AVDD on Bottom Layer "NONET_L-01_P-001" (solid, pour order 350): 56.5,16 56.4,15.9 56.4,13.4 36.5,13.4 33.5,10.4 31.3,10.4 31.3,12.4 24.2,19.5 22.9,18.2 9.9,18.2 9.9,19.7 4.6,25 4.6,27.4 8.8,27.4 9.4,26.8 9.4,23.4 26.5,23.4 34.1,15.8
SYS_GND on Layer 3 "SYS_GND_L03_P347" (solid, pour order 347): 0,4 0,48 cw(c4,48) 4,52 61,52 cw(c61,48) 65,48 65,4 cw(c61,4) 61,0 4,0 cw(c4,4)

## Other copper
Top Layer:
  pour cut-out: 25.004,22.833 25.096,22.795 25.187,22.734 25.257,22.664 25.317,22.573 25.355,22.482 25.377,22.375 25.377,22.35 25.381,22.325 25.381,22.109 25.436,22.146 25.453,22.157 25.55,22.197 25.621,22.211 25.647,22.216 25.676,22.21 25.744,22.197 25.842,22.157 25.924,22.102 25.968,22.036 25.979,22.019 26.019,21.922 26.035,21.844 26.039,21.825 26.039,21.004 26.052,21.001 26.138,20.966 26.15,20.961 26.232,20.906 26.381,20.757 26.425,20.691 26.436,20.675 26.476,20.577 26.488,20.519 26.495,20.48 26.495,17.829 26.484,17.771 26.476,17.732 26.461,17.697 26.436,17.635 26.381,17.552 25.552,16.723 25.502,16.69 25.469,16.668 25.372,16.628 25.275,16.609 25,16.609 24.961,16.616 24.903,16.628 24.806,16.668 24.723,16.723 24.679,16.789 24.668,16.806 24.628,16.903 24.614,16.974 24.609,17 24.615,17.029 24.628,17.097 24.668,17.194 24.723,17.277 24.789,17.321 24.806,17.332 24.903,17.372 24.981,17.387 25,17.391 25.113,17.391 25.713,17.991 25.713,19.171 24.15,19.171 24.053,19.191 23.971,19.246 23.916,19.328 23.896,19.425 23.896,20.375 23.916,20.472 23.971,20.554 24.053,20.609 24.15,20.629 24.609,20.629 24.609,20.851 24.599,20.855 24.508,20.916 24.438,20.986 24.377,21.077 24.339,21.168 24.318,21.275 24.318,21.3 24.313,21.325 24.313,22.325 24.318,22.35 24.318,22.375 24.339,22.482 24.377,22.573 24.438,22.664 24.508,22.734 24.599,22.795 24.69,22.833 24.798,22.854 24.897,22.854
  pour cut-out: 19.475,30.234 19.557,30.179 19.612,30.097 19.631,30 19.631,28.466 21.188,26.909 22.819,26.909 22.923,26.929 22.948,26.929 22.972,26.934 23.972,26.934 23.997,26.929 24.022,26.929 24.129,26.908 24.221,26.87 24.312,26.809 24.382,26.739 24.442,26.648 24.48,26.557 24.502,26.45 24.502,26.35 24.48,26.243 24.442,26.152 24.382,26.061 24.321,26 24.382,25.939 24.442,25.848 24.48,25.757 24.502,25.65 24.502,25.55 24.48,25.443 24.442,25.352 24.382,25.261 24.312,25.191 24.221,25.13 24.129,25.092 24.022,25.071 23.997,25.071 23.972,25.066 22.972,25.066 22.948,25.071 22.923,25.071 22.819,25.091 21.188,25.091 19.631,23.534 19.631,22 19.612,21.903 19.557,21.821 19.475,21.766 19.377,21.746 18.677,21.746 18.58,21.766 18.498,21.821 18.443,21.903 18.424,22 18.424,24 18.443,24.097 18.498,24.179 18.58,24.234 18.677,24.254 18.912,24.254 20.618,25.96 20.639,25.974 20.656,25.991 20.669,26 20.656,26.009 20.639,26.026 20.618,26.04 18.912,27.746 18.677,27.746 18.58,27.766 18.498,27.821 18.443,27.903 18.424,28 18.424,30 18.443,30.097 18.498,30.179 18.58,30.234 18.677,30.254 19.377,30.254
  pour cut-out: 25.947,35.609 26.029,35.554 26.084,35.472 26.104,35.375 26.104,34.885 26.138,34.871 26.15,34.866 26.232,34.811 26.381,34.662 26.425,34.597 26.436,34.58 26.476,34.483 26.488,34.424 26.495,34.386 26.495,31.52 26.484,31.462 26.476,31.423 26.461,31.388 26.436,31.325 26.381,31.243 26.194,31.057 26.167,31.039 26.112,31.002 26.075,30.987 26.117,30.923 26.155,30.832 26.177,30.725 26.177,30.7 26.181,30.675 26.181,29.675 26.177,29.65 26.177,29.625 26.155,29.518 26.117,29.427 26.057,29.336 25.987,29.266 25.896,29.205 25.804,29.167 25.697,29.146 25.598,29.146 25.49,29.167 25.399,29.205 25.308,29.266 25.247,29.326 25.187,29.266 25.096,29.205 25.004,29.167 24.897,29.146 24.798,29.146 24.69,29.167 24.599,29.205 24.508,29.266 24.438,29.336 24.377,29.427 24.339,29.518 24.318,29.625 24.318,29.65 24.313,29.675 24.313,30.675 24.318,30.7 24.318,30.725 24.339,30.832 24.377,30.923 24.438,31.014 24.456,31.032 24.456,31.371 24.15,31.371 24.053,31.391 23.971,31.446 23.916,31.528 23.896,31.625 23.896,32.575 23.916,32.672 23.971,32.754 24.053,32.809 24.15,32.829 25.713,32.829 25.713,34.163 25.67,34.171 24.15,34.171 24.053,34.191 23.971,34.246 23.916,34.328 23.896,34.425 23.896,35.375 23.916,35.472 23.971,35.554 24.053,35.609 24.15,35.629 25.85,35.629
  pour cut-out: 25.335,31.371 25.239,31.371 25.239,31.032 25.247,31.024 25.256,31.032 25.256,31.147 25.275,31.244 25.311,31.33 25.316,31.342
Layer 2:
  pour cut-out: 10.808,25.63 10.847,25.622 10.944,25.582 10.999,25.545 11.027,25.527 11.054,25.486 11.082,25.444 11.122,25.347 11.13,25.308 11.141,25.25 11.13,25.192 11.122,25.153 11.082,25.056 11.027,24.973 6.51,20.456 6.51,17.565 6.692,17.444 6.762,17.374 6.895,17.175 6.917,17.122 6.932,17.084 6.979,16.85 6.979,16.75 6.932,16.516 6.921,16.49 6.895,16.425 6.762,16.226 6.692,16.156 6.493,16.024 6.44,16.002 6.402,15.986 6.168,15.939 6.069,15.939 5.835,15.986 5.808,15.997 5.743,16.024 5.545,16.156 5.475,16.226 5.342,16.425 5.32,16.478 5.304,16.516 5.258,16.75 5.258,16.85 5.304,17.084 5.315,17.11 5.342,17.175 5.475,17.374 5.545,17.444 5.727,17.565 5.727,20.618 5.746,20.715 5.782,20.801 5.787,20.813 5.842,20.895 10.473,25.527 10.514,25.554 10.556,25.582 10.653,25.622 10.678,25.627 10.75,25.641
  pour cut-out: 6.168,37.661 6.402,37.614 6.429,37.603 6.493,37.576 6.692,37.444 6.762,37.374 6.895,37.175 6.917,37.122 6.932,37.084 6.979,36.85 6.979,36.75 6.932,36.516 6.921,36.49 6.895,36.425 6.762,36.226 6.692,36.156 6.493,36.024 6.44,36.002 6.402,35.986 6.168,35.939 6.069,35.939 5.854,35.982 5.529,35.657 5.529,32.525 11.027,27.027 11.054,26.986 11.082,26.944 11.122,26.847 11.127,26.822 11.141,26.75 11.13,26.692 11.122,26.653 11.082,26.556 11.045,26.501 11.027,26.473 10.986,26.446 10.944,26.418 10.847,26.378 10.808,26.37 10.75,26.359 10.692,26.37 10.653,26.378 10.556,26.418 10.473,26.473 4.861,32.086 4.828,32.135 4.806,32.168 4.765,32.266 4.746,32.363 4.746,35.819 4.765,35.916 4.801,36.002 4.806,36.013 4.861,36.096 5.3,36.535 5.258,36.75 5.258,36.85 5.304,37.084 5.315,37.11 5.342,37.175 5.475,37.374 5.545,37.444 5.743,37.576 5.797,37.598 5.835,37.614 6.069,37.661 6.168,37.661

## Silkscreen, mask and mechanical layers (free items; w line width, h text height)
Top Overlay:
  lines w0.2: 35.047,8.655 39.347,8.655 ; 35.1,17.9 44.6,17.9 ; 35.2,32.9 44.6,32.9 44.6,38.1 ; 35.2,38.1 46.1,38.1 ; 35.6,32.9 45.1,32.9 ; 45.4,18.6 45.4,19.7 ; 45.5,22.2 45.5,26.3 ; 45.502,28.1 45.502,31.1 ; 46.9,40.7 46.9,50.1 ; 49.8,13.8 49.8,21.9 ; 50.8,23 51.1,23 55.101,23 55.101,16.1
  lines w0.5: 1.942,26 7.96,26
  text "HIGHGAIN" at 11.664,49.5 h0.8
  text "ADC" at 44.366,49.2 h1.2
  text "TIA A" at 10.483,44.8 h1.2
  text "MIDGAIN" at 16.802,44.3 h1.2
  text "I/O to RPI" at 56.7,43 h1.2
  text "LOWGAIN" at 16.702,38.3 h1.2
  text "Clock" at 41.472,32.9 h1.2
  text "AIO | BIO" at 1.7,28.698 h1.2 r270
  text "3.3" at 47.3,27.148 h1.2 r90
  text "BAT" at 47.3,22.648 h1.2 r90
  text "DDC Level Shifters" at 36.2,22.274 h1.2 r90
  text "A5V" at 52.758,22 h1.2
  text "DDC" at 29.516,19.75 h1.2
  text "LOWGAIN" at 17.102,13.2 h1.2
  text "ADC5V" at 44.407,12.9 h1.2
  text "JLCJLCJLC" at 60.05,9.95 h0.8 r90
  text "D5V" at 37.3,8.783 h1.2 r90
  text "MIDGAIN" at 17.102,7.3 h1.2
  text "TIA B" at 10.583,6.8 h1.2
  text "-10V" at 37.3,5.483 h1.2 r90
  text "HIGHGAIN" at 11.664,2 h0.8
Bottom Overlay:
  drawing of 3314 lines, arcs and shapes, not listed
  text "CH-A HIGH" at 45.214,48.5 h1.2
  text "CH-A MED" at 45.214,46.5 h1.2
  text "CH-A LOW" at 45.214,44.5 h1.2
  text "CH-A BIAS" at 7.875,43.75 h1.2
  text "CH-B HIGH" at 45.214,42.5 h1.2
  text "CH-B MID" at 45.214,40.5 h1.2
  text "ALTAIR PhotoDiode ReadOut (PDRO)" at 33.5,40 h4
  text "CH-B LOW" at 45.214,38.5 h1.2
  text "CH-A IO" at 3,38.357 h1.2 r90
  text "UVIC" at 60.908,31.474 h3.21
  text "D.R., / P.D.B., / N.S." at 61.5,22.196 h4
  text "ADC AVDD (5V)" at 47.464,19 h1.2
  text "CH-B IO" at 3,18.357 h1.2 r90
  text "D5V (5V)" at 39.857,14.5 h1.2
  text "AVDD (5V)" at 58.107,12 h1.2
  text "CH-B BIAS" at 11.625,8.75 h1.2
  text "\"Squad\"" at 30.477,8.396 h4
  text ".Revision" at 34.946,4.896 h4
  text "AVSS (-10V)" at 48.964,4 h1.2
Mechanical 1:
  the board outline again, w0.2

## Dimensions
4,52 to 4,0 on Mechanical 1
0,4 to 65,4 on Mechanical 1